# Altium PCB Adafruit 128x64 Mono OLED PCB v2.PcbDoc
Units mil, origin at the board's own origin, x right, y up, seen from the top; angles counter-clockwise.
Board outline 2496.06 x 2121.75 mil, 2 copper layers (Top, Bottom); 36 components, 22 nets, 101 pads, 21 vias.
Unrouted connection lines stored in the file: 32.
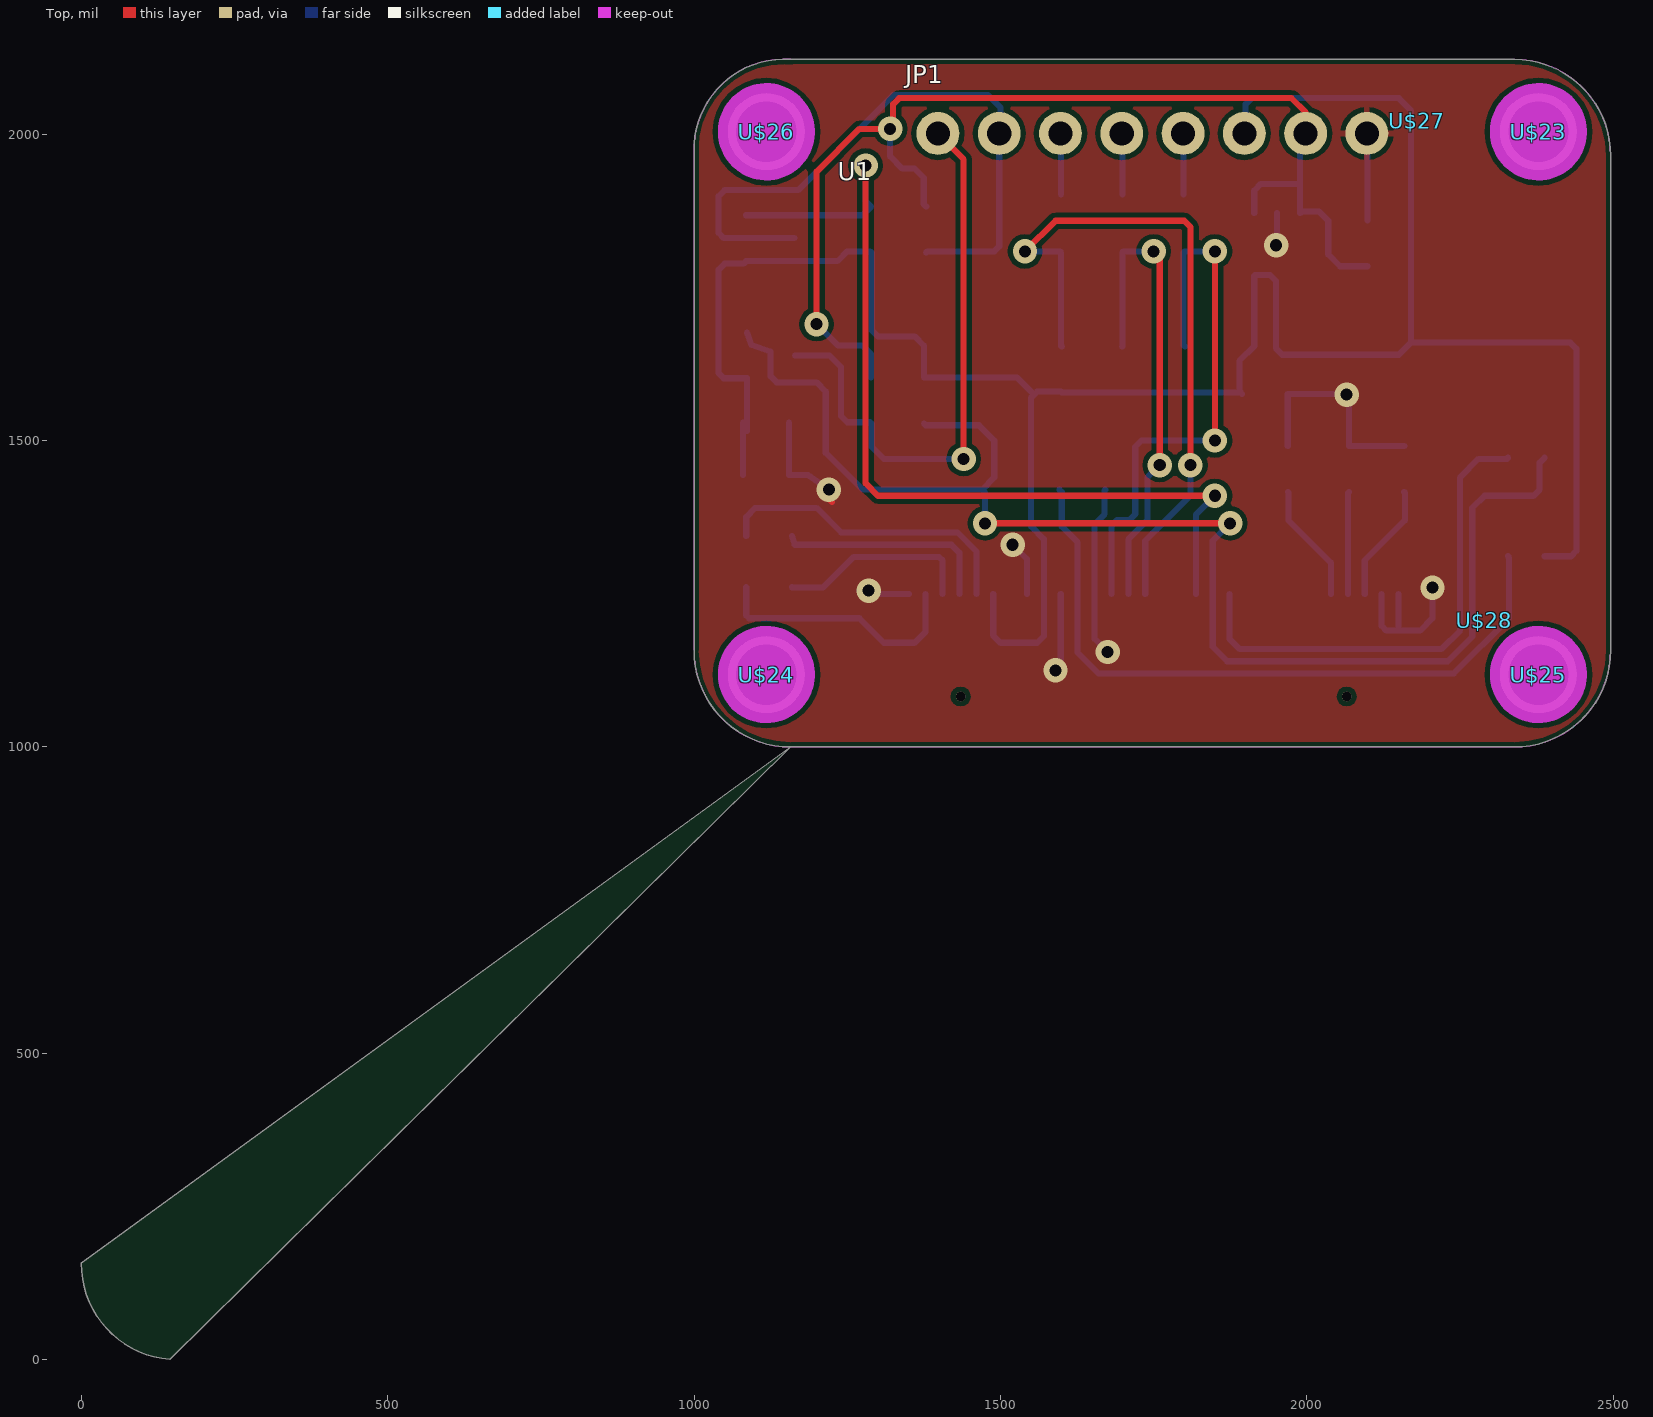
[diagram p0: Top view]
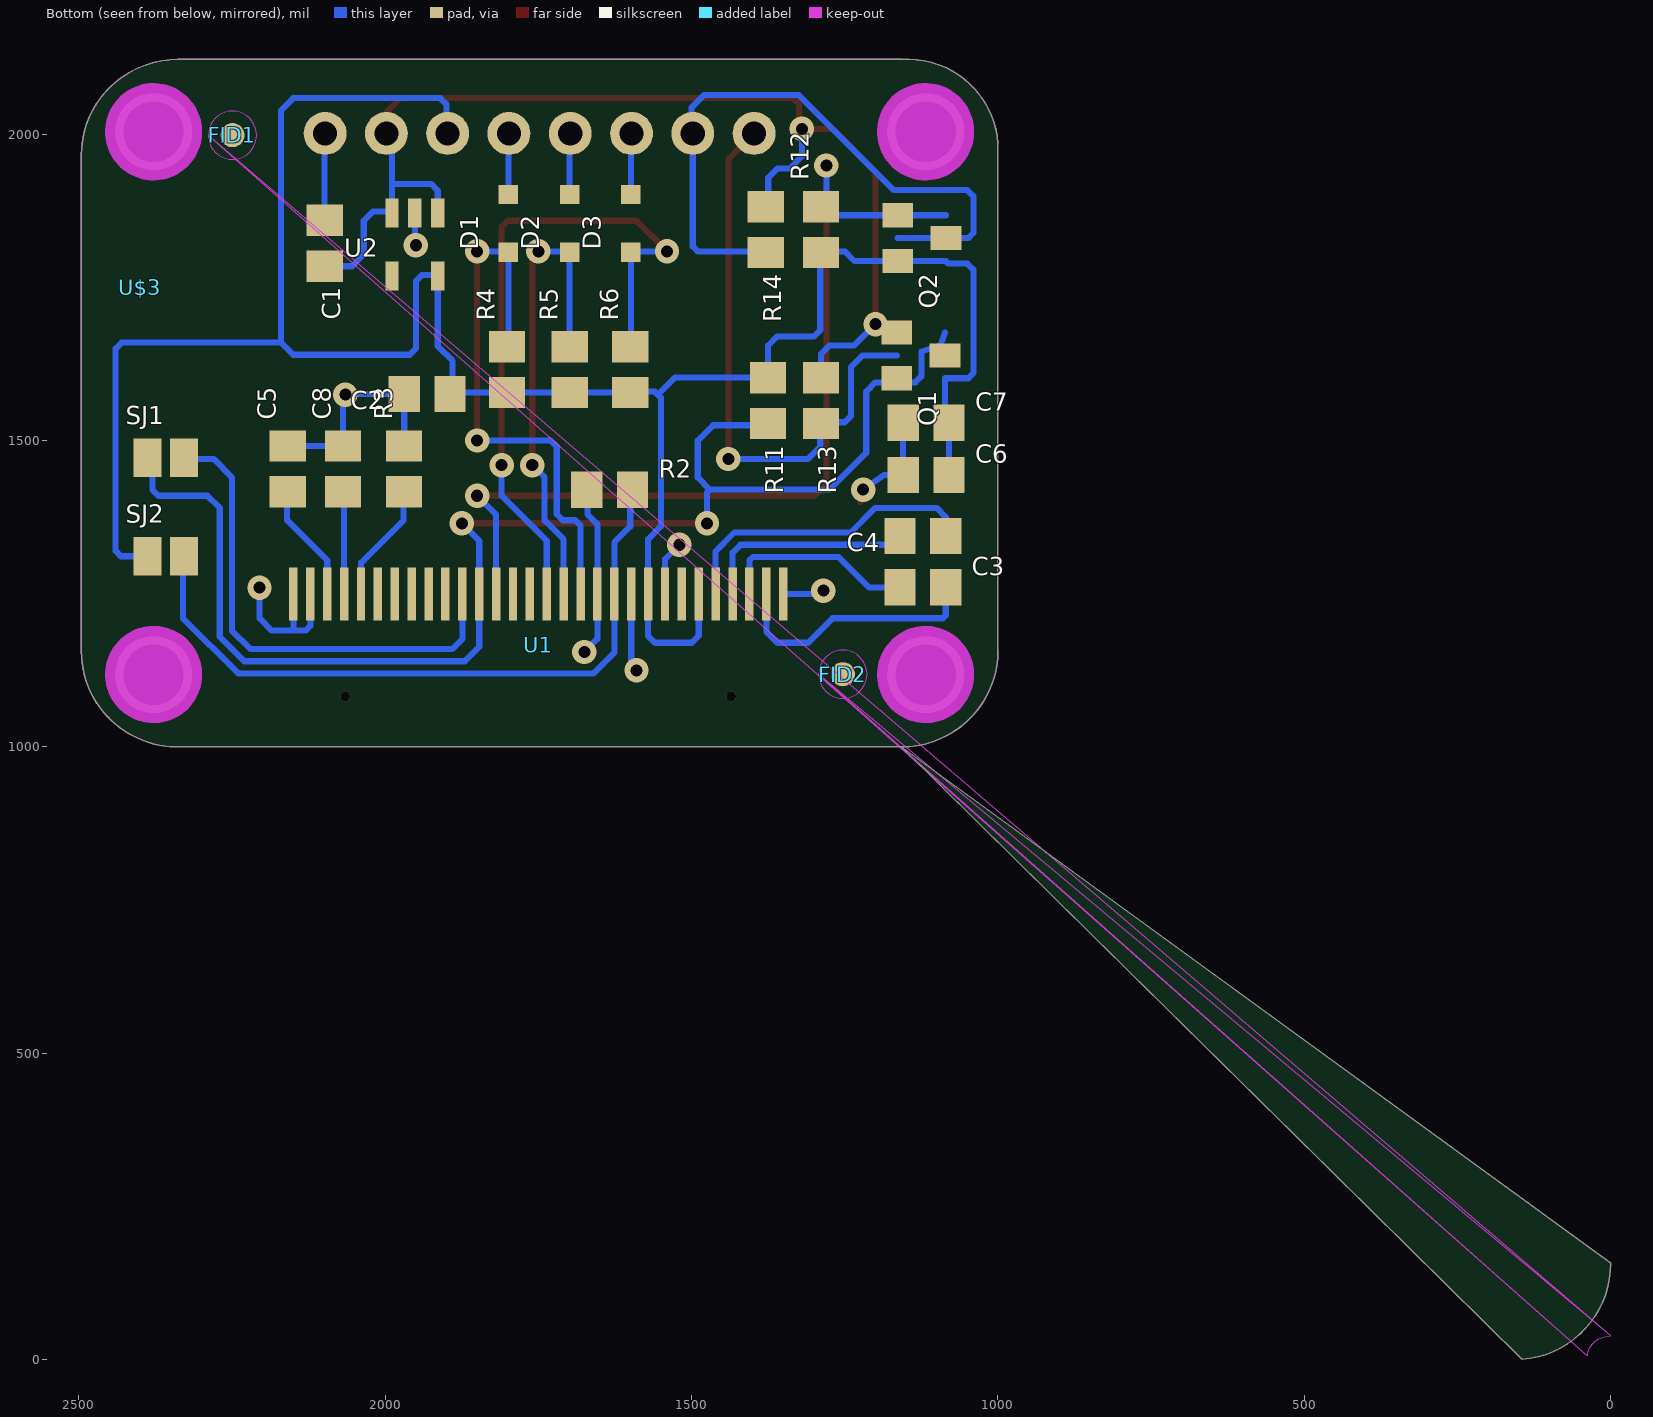
[diagram p1: Bottom view, seen from below]

## Layer stack, top to bottom
Top Solder: solder mask 0.4, Solder Resist, Dk 3.5
Top: signal copper 1.378
Dielectric 1: dielectric 12.6, FR-4, Dk 4.8
Bottom: signal copper 1.378
Bottom Solder: solder mask 0.4, Solder Resist, Dk 3.5

## Board outline
1157.48,1000 cw(c1157.48,1157.48) 1000,1157.48 1000,1984.25 cw(c1147.64,1974.41) 1157.48,2122.05 2338.58,2122.05 cw(c2338.58,1964.57) 2496.06,1964.57 2496.06,1157.48 cw(c2338.58,1157.48) 2338.58,1000 1157.48,1000 cw(c157.48,157.48)

## Design rules (kind name [scope] priority, off if disabled: settings)
Clearance "Clearance (Same Net)" [All] p1: gap=8 ignorepadtopadclearanceinfootprint=FALSE
Clearance [All] p2: gap=8 ignorepadtopadclearanceinfootprint=FALSE except(10: Arc-Poly Track-Poly SMDPad-Poly THPad-Poly Via-Poly Fill-Poly Poly-Poly Poly-Region Poly-Text Poly-Hole)
HoleSize [All] p1: absolutevalues=TRUE maxlimit=100000 minlimit=15.75 maxpercent=80.000 minpercent=20.000
HoleToHoleClearance mdDrill [All] p1: gap=8 allowstackedmicrovias=TRUE
PasteMaskExpansion Expansion_SMDPaste_OFF [InPadClass('SMDPaste_OFF')] p1: expansion=0
PasteMaskExpansion mlMinCreamFrame [All] p2: expansion=0
PolygonConnect ThermalVias [IsVia] p1: connectstyle=Direct reliefconductorwidth=10 reliefentries=4 polygonreliefangle="90 Angle" airgapwidth=10
PolygonConnect [All] p2: connectstyle=Relief reliefconductorwidth=10 reliefentries=4 polygonreliefangle="90 Angle" airgapwidth=8
RoutingVias [All] p1: holewidth=15.75 width=35.75 viastyle="Through Hole" minholewidth=15.75 minwidth=35.75 maxholewidth=100 maxwidth=100
SolderMaskExpansion Expansion_SMDSolder_OFF [InPadClass('SMDSolder_OFF')] p1: expansion=0
SolderMaskExpansion mlMinStopFrame [All] p2: expansion=3
Width [All] p1: maxlimit=10000 minlimit=8 preferedwidth=8
27 further rules are at their usual default settings.

## Classes and differential pairs
polygon class Isolate_10: Polygon_1_Net_GND
pad class SMDSolder_OFF: FID1-1 FID2-1
pad class SMDPaste_OFF: FID1-1 FID2-1 SJ1-1 SJ1-2 SJ2-1 SJ2-2

## Components (designator, comment, footprint, x,y, rotation, side; value= is the part's Value field where it differs from the comment)
C1 "10uF" 0805 2098.74,1821.97 r270 bottom
C2 "10uF" 0805 1931.57,1576.22 r0 bottom
C3 "1uF" 0805 1122.6,1260.63 r180 bottom
C4 "1uF" 0805 1122.6,1344.37 r0 bottom
C5 "10uF" 0805 2159.06,1453.78 r90 bottom
C6 "1uF" 0805 1117.4,1444.06 r180 bottom
C7 "1uF" 0805 1117.4,1529.06 r180 bottom
C8 "2.2uF/16V" 0805 2069.06,1453.78 r90 bottom
D1 "1N4148" SOD-323 1799.06,1854.41 r90 bottom
D2 "1N4148" SOD-323 1699.06,1854.41 r90 bottom
D3 "1N4148" SOD-323 1599.06,1854.41 r90 bottom
FID1 "" FIDUCIAL_1MM 2249.21,1998.35 r180 bottom
FID2 "" FIDUCIAL_1MM 1253.11,1118.74 r180 bottom
JP1 "" 1X08_ROUND_70 1748.03,2001.18 r0 top
Q1 "BSS138" SOT23-WIDE 1125.91,1639.06 r270 bottom
Q2 "BSS138" SOT23-WIDE 1124.33,1830.32 r270 bottom
R2 "10K" 0805 1633.78,1419.69 r180 bottom
R3 "390K" 0805 1969.06,1453.78 r90 bottom
R4 "10K" 0805 1801.3,1615.94 r90 bottom
R5 "10K" 0805 1698.78,1615.94 r90 bottom
R6 "10K" 0805 1600.04,1615.94 r90 bottom
R11 "10K" 0805 1375.32,1565.28 r270 bottom
R12 "10K" 0805 1289.06,1844.41 r90 bottom
R13 "10K" 0805 1289.06,1565.35 r270 bottom
R14 "10K" 0805 1379.06,1844.41 r270 bottom
SJ1 "" SOLDERJUMPER_REFLOW_NOPASTE 2358.11,1471.89 r180 bottom
SJ2 "" SOLDERJUMPER_REFLOW_NOPASTE 2358.11,1311.26 r180 bottom
U1 "UG-2864HSWEG01" UG-2864HSWEG01_0.96IN_WRAPAROUND 1750.08,1296.93 r0 top
U2 "" SOT23-5 1951.57,1819.96 r0 bottom
U$3 "" ADAFRUIT_5MM 2400,1750 r180 bottom
U$23 "" MOUNTINGHOLE_2.5_PLATED 2377.95,2003.94 r0 top
U$24 "" MOUNTINGHOLE_2.5_PLATED 1118.11,1118.11 r0 top
U$25 "" MOUNTINGHOLE_2.5_PLATED 2377.95,1118.11 r0 top
U$26 "" MOUNTINGHOLE_2.5_PLATED 1118.11,2003.94 r0 top
U$27 "" ADAFRUIT_2.5MM 2179.53,2021.73 r270 top
U$28 "" LOGIC_5VREADY_5MM 2289.53,1206.69 r0 top

## Footprints (in the part's own frame and the unit in brackets; to place one, negate y for a bottom-side part, rotate by r counter-clockwise, add the part's x,y. Pads: shape width x height; smd on the part's side, far side on the other; paste and mask are expansions set on the pad)
1X08_ROUND_70 [mil] "1X08_ROUND_70"
  round 70 / inner round 60 / far side round 70 hole 39.37: 1(-350,0) 2(-250,0) 3(-150,0) 4(-50,0) 5(50,0) 6(150,0) 7(250,0) 8(350,0)
0805 [mil] "0805"
  rect 51.18x59.06 smd: 1(-37.4,0) 2(37.4,0)
ADAFRUIT_2.5MM [mil] "ADAFRUIT_2.5MM"
ADAFRUIT_5MM [mil] "ADAFRUIT_5MM"
FIDUCIAL_1MM [mm] "FIDUCIAL_1MM"
  rrect100% 1x1 smd paste+0 mask+0: 1(0,0)
  Top keep-out region: -1,0 -0.924,-0.383 -0.707,-0.707 -0.383,-0.924 0,-1 0,-1 0.383,-0.924 0.707,-0.707 0.924,-0.383 1,0 1,0 0.924,0.383 0.707,0.707 0.383,0.924 0,1 0,1 -0.383,0.924 -0.707,0.707 -0.924,0.383 -1,0 -1,0 56.264,-50.258 56.63,-49.892
LOGIC_5VREADY_5MM [mil] "LOGIC_5VREADY_5MM"
MOUNTINGHOLE_2.5_PLATED [mil] "MOUNTINGHOLE_2.5_PLATED"
  round 125.98 / inner round 60 / far side round 125.98 hole 98.43: P$1(0,0)
  Top keep-out circle w80: c0,0 r39.37
  Bottom keep-out circle w80: c0,0 r39.37
SOD-323 [mil] "SOD-323"
  rect 31.5x31.5 smd: A(47.24,0) C(-47.24,0)
SOLDERJUMPER_REFLOW_NOPASTE [mil] "SOLDERJUMPER_REFLOW_NOPASTE"
  rect 46x63 smd paste+0: 1(-30,0) 2(30,0)
SOT23-5 [mil] "SOT23-5"
  rect 21.65x47.24 smd: 1(-37.4,-51.19) 2(0,-51.19) 3(37.4,-51.19) 4(37.4,51.19) 5(-37.4,51.19)
SOT23-WIDE [mm] "SOT23-WIDE"
  rect 1x1.27 smd: 1(-0.95,-1) 2(0.95,-1) 3(0,1)
UG-2864HSWEG01_0.96IN_WRAPAROUND [mm] "UG-2864HSWEG01_0.96IN_WRAPAROUND"
  rect 0.35x2.2 smd far side: 1(-10.15,-1.2) 2(-9.45,-1.2) 3(-8.75,-1.2) 4(-8.05,-1.2) 5(-7.35,-1.2) 6(-6.65,-1.2) 7(-5.95,-1.2) 8(-5.25,-1.2) 9(-4.55,-1.2) 10(-3.85,-1.2) 11(-3.15,-1.2) 12(-2.45,-1.2) 13(-1.75,-1.2) 14(-1.05,-1.2) 15(-0.35,-1.2) 16(0.35,-1.2) 17(1.05,-1.2) 18(1.75,-1.2) 19(2.45,-1.2) 20(3.15,-1.2) 21(3.85,-1.2) 22(4.55,-1.2) 23(5.25,-1.2) 24(5.95,-1.2) 25(6.65,-1.2) 26(7.35,-1.2) 27(8.05,-1.2) 28(8.75,-1.2) 29(9.45,-1.2) 30(10.15,-1.2)
  round 0.4 hole 0.4 unplated: 1(-8,-5.45) 1(8,-5.45)

## Part data
C1 C2 C3 C4 C5 C6 C7 C8 R2 R3 R4 R5 R6 R11 R12 R13 R14: library part 0805, PackageName=0805
D1 D2 D3: library part SOD-323, PackageName=SOD-323
FID1 FID2: library part FIDUCIAL_1MM, PackageName=FIDUCIAL_1MM
JP1: library part 1X08_ROUND_70, PackageName=1X08_ROUND_70
Q1 Q2: library part SOT23-WIDE, PackageName=SOT23-WIDE
SJ1 SJ2: library part SOLDERJUMPER_REFLOW_NOPASTE, PackageName=SOLDERJUMPER_REFLOW_NOPASTE
U1: library part UG-2864HSWEG01_0.96IN_WRAPAROUND, PackageName=UG-2864HSWEG01_0.96IN_WRAPAROUND
U2: library part SOT23-5, PackageName=SOT23-5
U$3: library part ADAFRUIT_5MM, PackageName=ADAFRUIT_5MM
U$23 U$24 U$25 U$26: library part MOUNTINGHOLE_2.5_PLATED, PackageName=MOUNTINGHOLE_2.5_PLATED
U$27: library part ADAFRUIT_2.5MM, PackageName=ADAFRUIT_2.5MM
U$28: library part LOGIC_5VREADY_5MM, PackageName=LOGIC_5VREADY_5MM

## Via types
v1: diameter 39.69/39.69 (per signal layer), hole 19.69, Top to Bottom, 21 vias

## Nets (pads, with @x,y where several pads share a name; then routed paths per layer and width w, separated by ;. In a path a pad name is that pad's centre, name@x,y a point inside that pad or via, vN(x,y) a via of type N, cw(c..) or ccw(c..) an arc to the next point about the centre after c; other vN are vias at no path point)
3.3V: C2.1 C6.2 C7.2 JP1.6 Q1.1 Q2.1 R4.2 R5.2 R6.2 R11.2 R12.2 SJ2.1 U1.6 U1.9 U2.5 | length 3997.3
  Bottom w10: C6.2 C7.2 1086.54,1515.59 1086.54,1601.65 1048.35,1601.65 1040,1610 1040,1778.74 1050,1788.74 1080.79,1788.74 1084.96,1792.91 1234.17,1792.91 1250,1808.74 1287.32,1808.74 1289.06,1807.01 1290,1806.06 1290,1680 1300,1670 1360,1670 1375.32,1654.68 1375.32,1602.68 1527.32,1602.68 1555,1575 ; U1.6 1488.27,1181.73 1500,1170 1560,1170 1570.94,1180.94 1570.94,1249.69 1570.94,1339.06 1550,1360 1550,1570 1555,1575 ; JP1.6 1900,2003.15 1900,2048.74 1910,2058.74 2150,2058.74 2170,2038.74 2170,1660 ; SJ2.1 2431.26,1311.26 2440,1320 2440,1650 2430,1660 2170,1660 ; 1555,1575 1560,1580 1598.58,1580 1600.04,1578.54 1698.78,1578.54 1801.3,1578.54 1891.85,1578.54 C2.1 1890,1580.39 1890,1630 1914.17,1654.17 U2.5 1915.4,1770 1940,1770 1950,1760 1950,1670 1950,1650 1960,1640 2150,1640 2170,1660
CS_3.3V: D1.A R4.1 U1.13 | length 917.3
  Top w10: v1(1850,1500) v1(1850,1808.74)
  Bottom w10: U1.13 1681.18,1361.18 1690,1370 1710,1370 1720,1380 1720,1490 1730,1500 v1(1850,1500) ; 1801.3,1653.35 1799.06,1655.59 1799.06,1807.17 1800.63,1808.74 v1(1850,1808.74)
CS_5.0V: D1.C JP1.5 | length 100
  Bottom w10: JP1.5 1799.06,2000.16 1799.06,1901.65
D0/SCLK/SCK_3.3V: Q2.2 R12.1 U1.18 | length 1553.6
  Top w10: v1(1280,1948.74) 1280,1430 1300,1410 v1(1850,1410)
  Bottom w10: 1084.96,1867.72 1274.96,1867.72 1289.06,1881.81 ; v1(1280,1948.74) 1280,1890.87 1289.06,1881.81 ; 1287.09,1883.78 1289.06,1881.81 ; U1.18 1818.98,1378.98 v1(1850,1410)
D0/SCLK/SCK_5.0V: JP1.2 Q2.3 R14.1 | length 1074.6
  Bottom w10: 1163.7,1830.32 1048.43,1830.32 1040,1838.74 1040,1898.74 1050,1908.74 1170,1908.74 1325,2063.74 1480,2063.74 1500,2043.74 1500,2003.15 JP1.2 1498.03,1816.77 1490,1808.74 1380.79,1808.74 1379.06,1807.01
D1/MOSI/SDA1_3.3V: Q1.2 R11.1 SJ1.1 U1.19 | length 2297.2
  Top w10: v1(1475,1365) v1(1875,1365)
  Bottom w10: 1086.54,1676.46 1093.54,1656.46 1125,1645 1125,1605 1135,1595 1200,1595 1215,1580 1215,1480 1275,1420 1470,1420 ; 1375.32,1527.87 1378.19,1525 1465,1525 1490,1500 1490,1440 1470,1420 ; v1(1475,1365) 1475,1415 1470,1420 ; v1(1875,1365) 1846.54,1336.54 U1.19 1846.54,1163.46 1870,1140 2230,1140 2270,1180 2270,1390 2290,1410 2370,1410 2380,1420 2380,1463.78 SJ1.1
D1/MOSI/SDA_5.0V: JP1.1 Q1.3 R13.1 | length 961.9
  Top w10: JP1.1 1398.03,2000.71 1440,1958.74 v1(1440,1470)
  Bottom w10: 1165.28,1639.06 1220.94,1639.06 1240,1620 1240,1540 1250,1530 1287.01,1530 1289.06,1527.95 1290,1527.01 1290,1490 1310,1470 v1(1440,1470)
DC/SA0_3.3V: D3.A R6.1 U1.15 | length 1138.4
  Top w10: v1(1540,1808.74) 1590,1858.74 1800,1858.74 1810,1848.74 v1(1810,1460)
  Bottom w10: v1(1540,1808.74) 1597.48,1808.74 1599.06,1807.17 1599.06,1654.33 1600.04,1653.35 ; U1.15 1736.3,1336.3 1810,1410 v1(1810,1460)
DC/SA0_5.0V: D3.C JP1.3 | length 100
  Bottom w10: JP1.3 1599.06,2000.16 1599.06,1901.65
GND: C1.2 C2.2 C5.1 C6.1 C7.1 C8.1 JP1.8 R2.1 R3.1 U1.1@1350.47,1249.69 U1.8 U1.10 U1.12 U1.29 U1.30 U2.2 | length 1622
  Top w10: v1(1220,1420) 1220,1405 1225,1400 ; v1@1270,1255 v1(1285,1255) ; v1(1520,1330) v1@1520,1335 ; v1@1590,1115 v1(1590,1125) ; v1(1675,1155) v1@1680,1155 ; v1(1950,1818.74) 1955,1818.74 v1@1960,1823.74 ; v1(2065,1575) v1@2075,1575 ; v1(2205,1260) v1@2205,1270
  Bottom w10: C7.1 C6.1 1185.94,1444.06 v1(1220,1420) ; v1(1285,1255) 1290.32,1249.69 U1.1@1350.47,1249.69 ; v1(1520,1330) 1543.39,1306.61 U1.8 ; v1(1590,1125) 1598.5,1133.5 U1.10 ; R2.1 1670,1418.5 1670,1380 1653.62,1363.62 U1.12 1653.62,1176.38 v1(1675,1155) ; v1(1950,1818.74) 1951.57,1820.32 U2.2 ; 1969.06,1491.18 1968.98,1491.26 C2.2 2063.78,1576.22 v1(2065,1575) 2069.06,1570.94 2069.06,1491.18 2159.06,1491.18 ; JP1.8 2098.74,2000.47 2098.74,1859.37 ; U1.29 2122.13,1197.87 2130,1190 2150,1190 ; U1.30 2149.69,1190.32 2150,1190 ; v1(2205,1260) 2205,1210 2185,1190 2150,1190
N$1: R2.2 SJ2.2 U1.11 | length 1135.4
  Bottom w10: R2.2 1600,1416.06 1600,1360 1626.06,1333.94 U1.11 1626.06,1153.94 1660,1120 2240,1120 2330,1210 2330,1309.37 SJ2.2
N$2: SJ1.2 U1.20 | length 810
  Bottom w10: U1.20 1874.09,1175.91 1890,1160 2220,1160 2250,1190 2250,1440 2280,1470 2326.22,1470 SJ1.2
N$3: R3.2 U1.26 | length 195.8
  Bottom w10: 1969.06,1416.38 1970,1415.43 1970,1370 2039.45,1300.55 U1.26
N$4: C3.2 U1.2 | length 426.3
  Bottom w10: C3.2 1085.2,1214.8 1090,1210 1270,1210 1310,1170 1360,1170 1378.03,1188.03 U1.2
N$5: C3.1 U1.3 | length 323.6
  Bottom w10: C3.1 1160.63,1260 1210,1260 1260,1310 1400,1310 1405.59,1304.41 U1.3
N$6: C4.2 U1.4 | length 356.4
  Bottom w10: C4.2 1164.37,1330 1420,1330 1433.15,1316.85 U1.4
N$7: C4.1 U1.5 | length 511.4
  Bottom w10: C4.1 1085.2,1375.2 1100,1390 1200,1390 1240,1350 1430,1350 1460.71,1319.29 U1.5
N$11: C5.2 U1.28 | length 194.2
  Bottom w10: U1.28 2094.57,1304.57 2160,1370 2160,1415.43 2159.06,1416.38
N$12: C8.2 U1.27 | length 167.5
  Bottom w10: U1.27 2067.01,1414.33 2069.06,1416.38
RST_3.3V: D2.A R5.1 U1.14 | length 790
  Top w10: v1(1750,1808.74) 1760,1798.74 v1(1760,1460)
  Bottom w10: 1698.78,1653.35 1699.06,1653.62 1699.06,1807.17 1700.63,1808.74 v1(1750,1808.74) ; U1.14 1708.74,1338.74 1740,1370 1740,1440 v1(1760,1460)
RST_5.0V: D2.C JP1.4 | length 100
  Bottom w10: JP1.4 1699.06,2000.16 1699.06,1901.65
VIN: C1.1 JP1.7 R13.2 R14.2 U2.1 U2.3 | length 1901.5
  Top w10: v1(1200,1690) 1200,1938.74 1270,2008.74 v1(1320,2008.74) 1325,2013.74 1325,2048.74 1335,2058.74 1975,2058.74 1998.03,2035.71 JP1.7
  Bottom w10: v1(1200,1690) 1235,1655 1275,1655 1289.06,1640.94 1289.06,1602.76 ; v1(1320,2008.74) 1320,1963.74 1340,1943.74 1360,1943.74 1375,1928.74 1375,1885.87 1379.06,1881.81 ; U2.1 1914.17,1907.91 1925,1918.74 1988.98,1918.74 ; JP1.7 1988.98,1992.13 1988.98,1918.74 ; 2098.74,1784.57 2054.17,1784.57 2035,1803.74 2035,1858.74 2020,1873.74 1991.57,1873.74 U2.3 1988.98,1918.74
pads on no net: FID1.1 FID2.1 U1.1@1435.12,1082.36 U1.1@2065.04,1082.36 U1.7 U1.16 U1.17 U1.21 U1.22 U1.23 U1.24 U1.25 U2.4 U$23.P$1 U$24.P$1 U$25.P$1 U$26.P$1

## Polygon pours and split planes (outlines as drawn)
GND on Top "Polygon_1_Net_GND" (solid, remove dead copper, pour order 0): 995,995 995,2123.74 2490,2123.74 2490,995

## Keep-outs
Keep-Out Layer:
  the board outline again, w0

## Silkscreen, mask and mechanical layers (free items; w line width, h text height)
Dimension:
  the board outline again, w0
Top Assembly:
  text "Data" at 1340.94,2054.41 h62
  text "SA0" at 1545.94,2054.41 h62
  text "CS" at 1765.94,2054.41 h62
  text "Vin" at 1955.94,2054.41 h62
  text "Clk" at 1450.94,1904.41 h62
  text "DC" at 1565.94,1904.41 h62
  text "Rst" at 1675.94,1904.41 h62
  text "3v3" at 1850.94,1904.41 h62
  text "Gnd" at 2050.94,1904.41 h62
  text "v2.1" at 1251.54,1028.78 h62
Bottom Assembly:
  text "SSD1306 0.96\" 128x64 OLED" at 2179.06,2059.41 h62
  text "For I2C" at 2460,1690 h62
  text "Close" at 2430,1630 h62
  text "SJ1/2" at 2440,1560 h62
  text "SJ1" at 2399.69,1376.89 h62
  text "SJ2" at 2404.37,1216.57 h62